# Altium PCB L50T-TEST.PcbDoc (part 2 of 3)
Units mil, origin at the board's own origin, x right, y up, seen from the top; angles counter-clockwise.
Board outline 6860.42 x 9197.04 mil, 2 copper layers (Top Layer, Bottom Layer); 174 components, 146 nets, 565 pads, 293 vias.
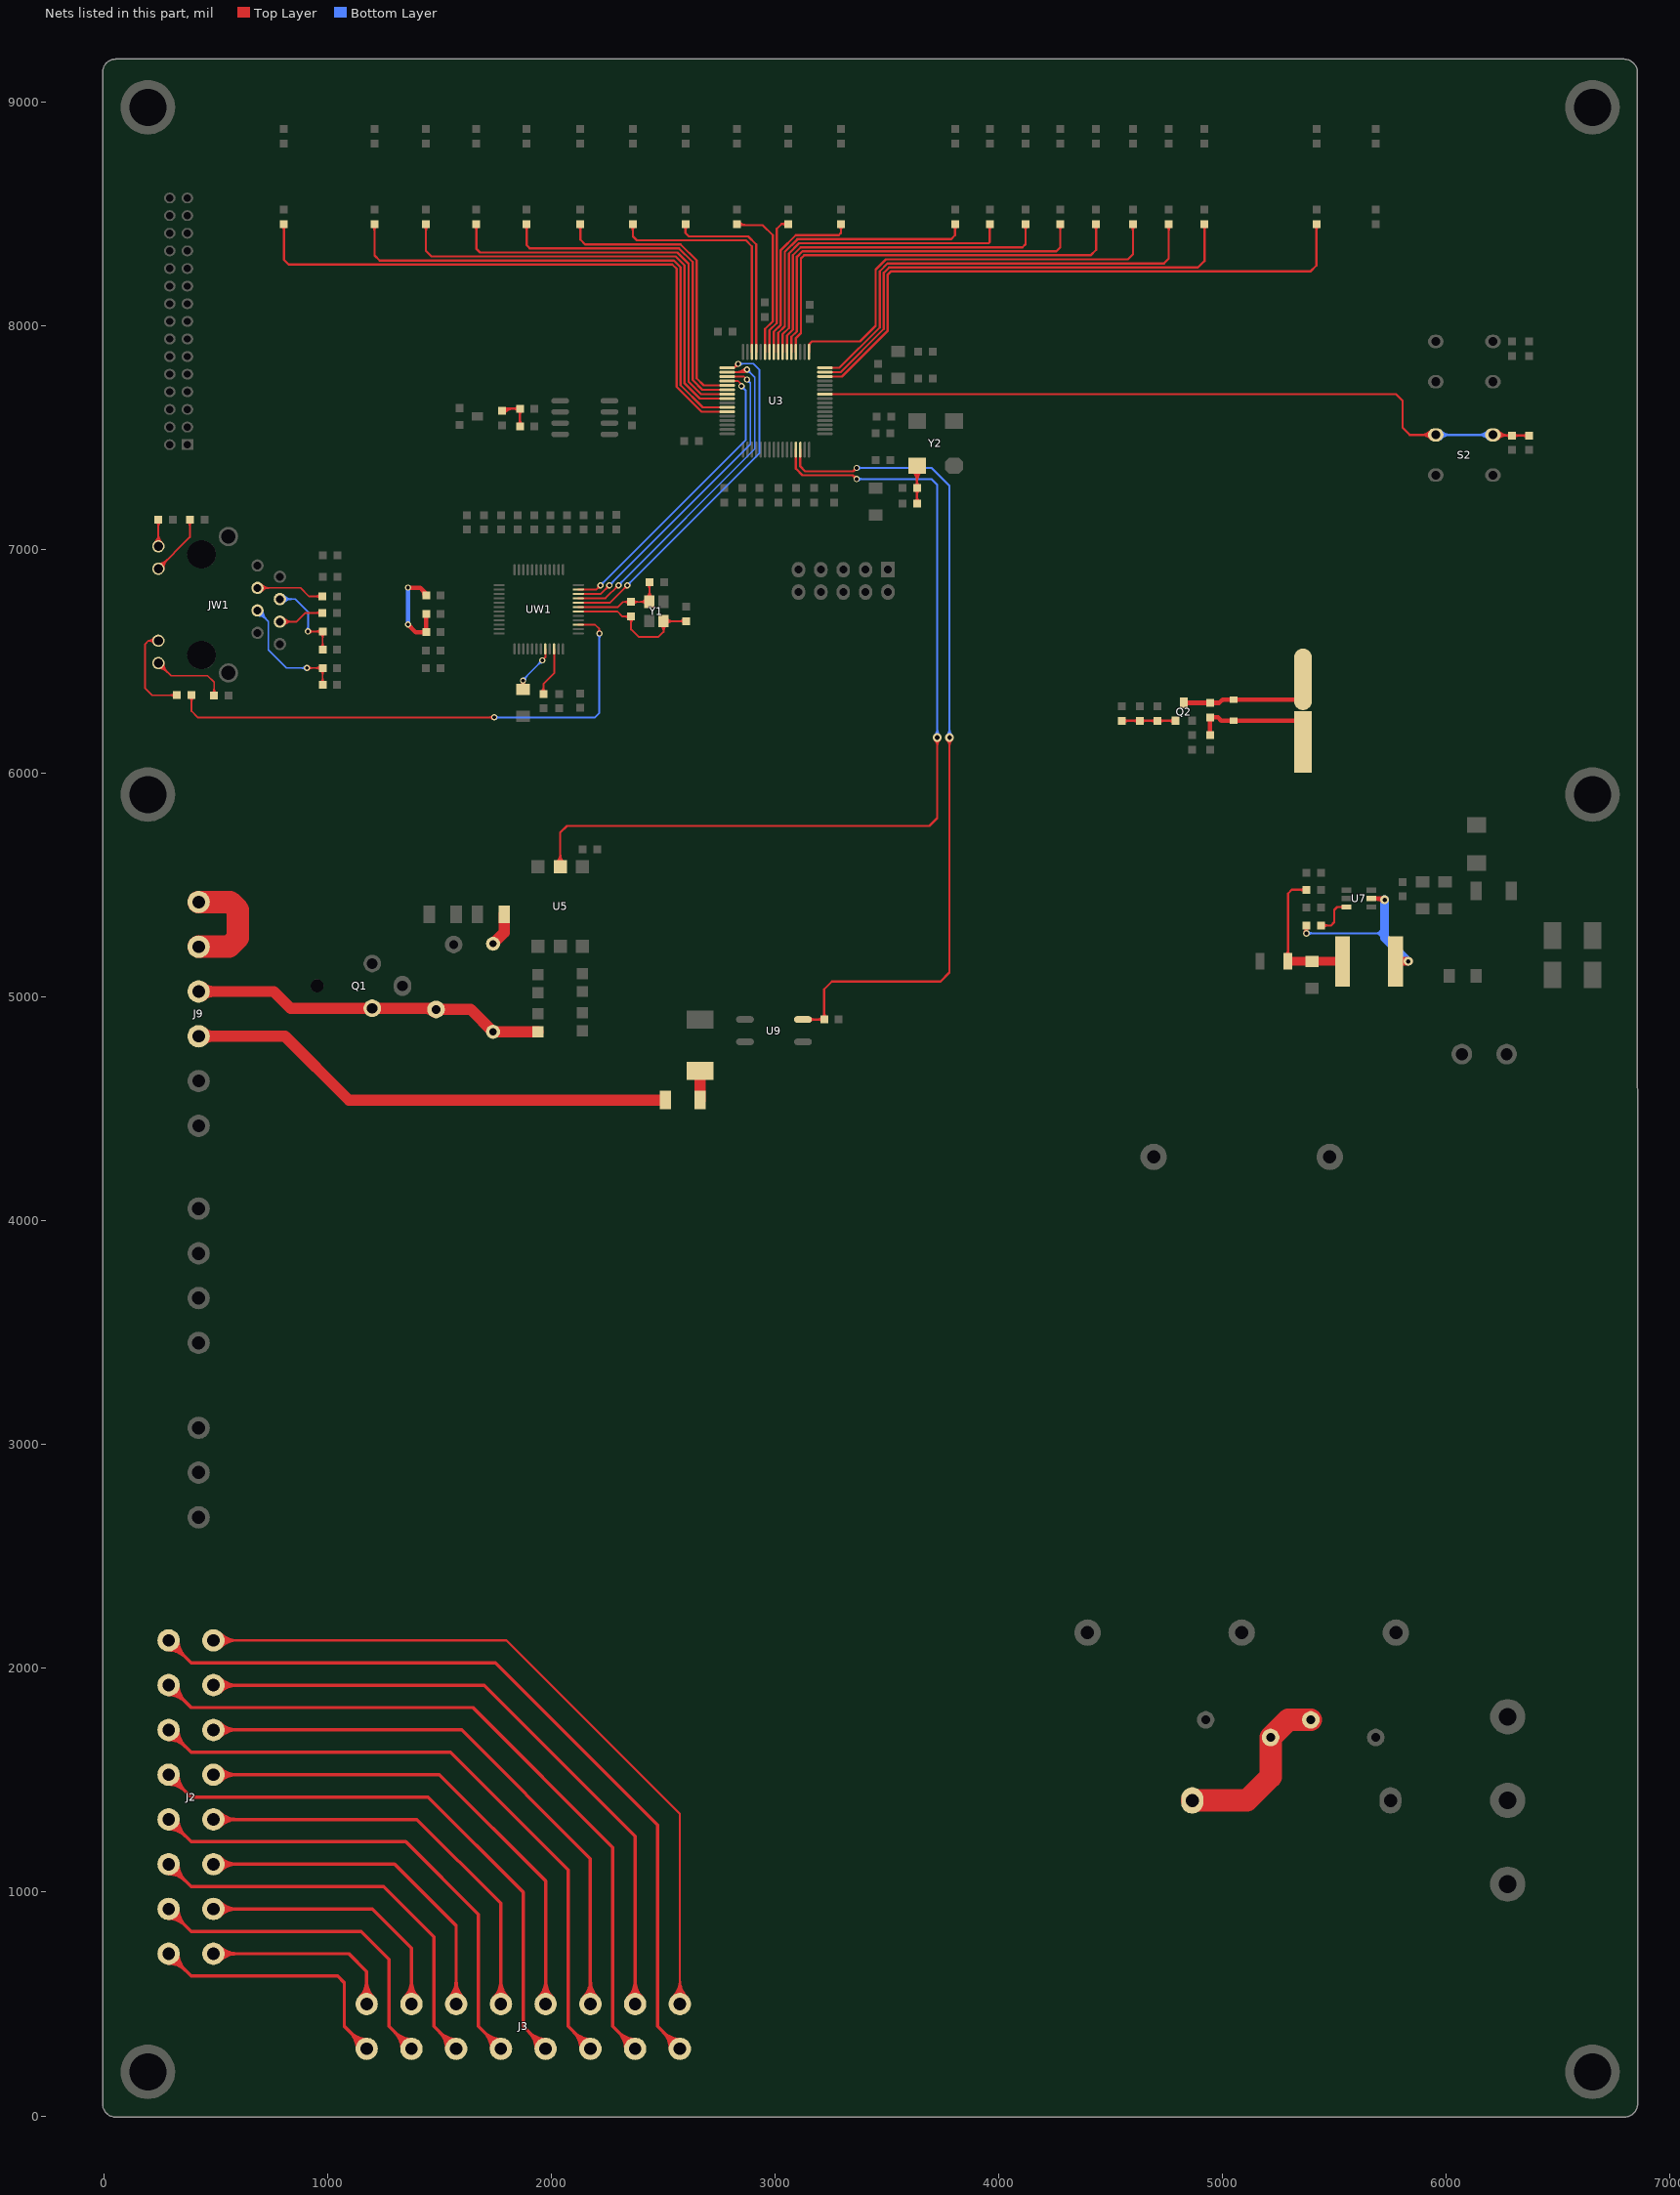
[diagram p2: the nets of this part, all layers, seen from the top]

## Via types
v1: diameter 30, hole 18, Top Layer to Bottom Layer, tented both sides, 242 vias
v2: diameter 28, hole 16, Top Layer to Bottom Layer, tented both sides, 44 vias
v3: diameter 40, hole 20, Top Layer to Bottom Layer, tented both sides, 5 vias
v4: diameter 60, hole 30, Top Layer to Bottom Layer, tented both sides, 2 vias

## Nets (pads, with @x,y where several pads share a name; then routed paths per layer and width w, separated by ;. In a path a pad name is that pad's centre, name@x,y a point inside that pad or via, vN(x,y) a via of type N, cw(c..) or ccw(c..) an arc to the next point about the centre after c; other vN are vias at no path point) (continued)
KEY2: C24.1 R47.2 S2.2 U3.10 | length 4749.4
  Top Layer w10: U3.10@3223.5,7694.53 5775.47,7694.53 5805,7665 5805,7545 5837.18,7512.82 S2.2@5953.27,7512.82 ; S2.2@6209.17,7512.82 6211.99,7510 C24.1@6295,7510 R47.2@6370,7510 ; 5887.91,7512.82 ccw(c5887.91,7573.18) 5930.59,7530.5 cw(c5887.91,7573.18) 5887.91,7512.82 ; 5887.91,7512.82 cw(c5887.91,7452.46) 5930.59,7495.14 ccw(c5887.91,7452.46) 5887.91,7512.82 ; 5912.05,7512.82 ccw(c5912.05,7549.03) 5937.66,7523.43 cw(c5912.05,7549.03) 5912.05,7512.82 ; 5912.05,7512.82 cw(c5912.05,7476.61) 5937.66,7502.21 ccw(c5912.05,7476.61) 5912.05,7512.82 ; 6264.82,7510 ccw(c6264.82,7540.18) 6286.16,7518.84 cw(c6264.82,7540.18) 6264.82,7510 ; 6264.82,7510 cw(c6264.82,7479.82) 6286.16,7501.16 ccw(c6264.82,7479.82) 6264.82,7510 ; 6325.18,7510 ccw(c6325.18,7479.82) 6303.84,7501.16 cw(c6325.18,7479.82) 6325.18,7510 ; 6325.18,7510 cw(c6325.18,7540.18) 6303.84,7518.84 ccw(c6325.18,7540.18) 6325.18,7510 ; 6339.82,7510 ccw(c6339.82,7540.18) 6361.16,7518.84 cw(c6339.82,7540.18) 6339.82,7510 ; 6339.82,7510 cw(c6339.82,7479.82) 6361.16,7501.16 ccw(c6339.82,7479.82) 6339.82,7510 ; S2.2@6224.78,7523.43 ccw(c6257.19,7555.84) 6257.19,7510 cw(c6257.19,7555.84) S2.2@6224.78,7523.43 ; S2.2@6231.85,7495.14 cw(c6267.72,7459.27) 6267.72,7510 ccw(c6267.72,7459.27) S2.2@6231.85,7495.14 ; S2.2@6231.85,7530.5 ccw(c6281.34,7579.98) 6281.34,7510 cw(c6281.34,7579.98) S2.2@6231.85,7530.5
  Bottom Layer w10: S2.2@5953.27,7512.82 S2.2@6209.17,7512.82 ; 5994.48,7512.82 ccw(c5994.48,7476.61) 5968.87,7502.21 cw(c5994.48,7476.61) 5994.48,7512.82 ; 5994.48,7512.82 cw(c5994.48,7549.03) 5968.87,7523.43 ccw(c5994.48,7549.03) 5994.48,7512.82 ; 6018.62,7512.82 ccw(c6018.62,7452.46) 5975.95,7495.14 cw(c6018.62,7452.46) 6018.62,7512.82 ; 6018.62,7512.82 cw(c6018.62,7573.18) 5975.95,7530.5 ccw(c6018.62,7573.18) 6018.62,7512.82 ; 6143.82,7512.82 ccw(c6143.82,7573.18) 6186.5,7530.5 cw(c6143.82,7573.18) 6143.82,7512.82 ; 6143.82,7512.82 cw(c6143.82,7452.46) 6186.5,7495.14 ccw(c6143.82,7452.46) 6143.82,7512.82 ; 6167.96,7512.82 ccw(c6167.96,7549.03) 6193.57,7523.43 cw(c6167.96,7549.03) 6167.96,7512.82 ; 6167.96,7512.82 cw(c6167.96,7476.61) 6193.57,7502.21 ccw(c6167.96,7476.61) 6167.96,7512.82
L1A: J2.2 J3.16 | length 2237.1
  Top Layer w15: J2.2@290,725 390,625 1045,625 1075,595 1075,400 J3.16@1175,300 ; 336.95,678.05 ccw(c290,631.11) 290,697.5 cw(c290,631.11) 336.95,678.05 ; 336.95,678.05 cw(c383.89,725) 317.5,725 ccw(c383.89,725) 336.95,678.05 ; 362.55,652.45 ccw(c290,579.9) 290,682.5 cw(c290,579.9) 362.55,652.45 ; 362.55,652.45 cw(c435.1,725) 332.5,725 ccw(c435.1,725) 362.55,652.45 ; 1102.45,372.55 ccw(c1175,445.1) 1175,342.5 cw(c1175,445.1) 1102.45,372.55 ; 1102.45,372.55 cw(c1029.9,300) 1132.5,300 ccw(c1029.9,300) 1102.45,372.55 ; 1128.05,346.95 ccw(c1175,393.89) 1175,327.5 cw(c1175,393.89) 1128.05,346.95 ; 1128.05,346.95 cw(c1081.11,300) 1147.5,300 ccw(c1081.11,300) 1128.05,346.95
L1B: J2.1 J3.15 | length 1925
  Top Layer w15: J2.1@490,725 1095,725 1175,645 J3.15@1175,500 ; 556.39,725 ccw(c556.39,658.61) 509.45,705.55 cw(c556.39,658.61) 556.39,725 ; 556.39,725 cw(c556.39,791.39) 509.45,744.45 ccw(c556.39,791.39) 556.39,725 ; 592.6,725 ccw(c592.6,622.4) 520.05,694.95 cw(c592.6,622.4) 592.6,725 ; 592.6,725 cw(c592.6,827.6) 520.05,755.05 ccw(c592.6,827.6) 592.6,725 ; 1175,566.39 ccw(c1241.39,566.39) 1194.45,519.45 cw(c1241.39,566.39) 1175,566.39 ; 1175,566.39 cw(c1108.61,566.39) 1155.55,519.45 ccw(c1108.61,566.39) 1175,566.39 ; 1175,602.6 ccw(c1277.6,602.6) 1205.05,530.05 cw(c1277.6,602.6) 1175,602.6 ; 1175,602.6 cw(c1072.4,602.6) 1144.95,530.05 ccw(c1072.4,602.6) 1175,602.6
L2A: J2.4 J3.14 | length 2581.4
  Top Layer w15: J2.4@290,925 390,825 1150,825 1275,700 1275,400 J3.14@1375,300 ; 336.95,878.05 ccw(c290,831.11) 290,897.5 cw(c290,831.11) 336.95,878.05 ; 336.95,878.05 cw(c383.89,925) 317.5,925 ccw(c383.89,925) 336.95,878.05 ; 362.55,852.45 ccw(c290,779.9) 290,882.5 cw(c290,779.9) 362.55,852.45 ; 362.55,852.45 cw(c435.1,925) 332.5,925 ccw(c435.1,925) 362.55,852.45 ; 1302.45,372.55 ccw(c1375,445.1) 1375,342.5 cw(c1375,445.1) 1302.45,372.55 ; 1302.45,372.55 cw(c1229.9,300) 1332.5,300 ccw(c1229.9,300) 1302.45,372.55 ; 1328.05,346.95 ccw(c1375,393.89) 1375,327.5 cw(c1375,393.89) 1328.05,346.95 ; 1328.05,346.95 cw(c1281.11,300) 1347.5,300 ccw(c1281.11,300) 1328.05,346.95
L2B: J2.3 J3.13 | length 2269.3
  Top Layer w15: J2.3@490,925 1200,925 1375,750 J3.13@1375,500 ; 556.39,925 ccw(c556.39,858.61) 509.45,905.55 cw(c556.39,858.61) 556.39,925 ; 556.39,925 cw(c556.39,991.39) 509.45,944.45 ccw(c556.39,991.39) 556.39,925 ; 592.6,925 ccw(c592.6,822.4) 520.05,894.95 cw(c592.6,822.4) 592.6,925 ; 592.6,925 cw(c592.6,1027.6) 520.05,955.05 ccw(c592.6,1027.6) 592.6,925 ; 1375,566.39 ccw(c1441.39,566.39) 1394.45,519.45 cw(c1441.39,566.39) 1375,566.39 ; 1375,566.39 cw(c1308.61,566.39) 1355.55,519.45 ccw(c1308.61,566.39) 1375,566.39 ; 1375,602.6 ccw(c1477.6,602.6) 1405.05,530.05 cw(c1477.6,602.6) 1375,602.6 ; 1375,602.6 cw(c1272.4,602.6) 1344.95,530.05 ccw(c1272.4,602.6) 1375,602.6
L3A: J2.6 J3.12 | length 2922.9
  Top Layer w15: J2.6@290,1125 390,1025 1250,1025 1475,800 1475,400 J3.12@1575,300 ; 336.95,1078.05 ccw(c290,1031.11) 290,1097.5 cw(c290,1031.11) 336.95,1078.05 ; 336.95,1078.05 cw(c383.89,1125) 317.5,1125 ccw(c383.89,1125) 336.95,1078.05 ; 362.55,1052.45 ccw(c290,979.9) 290,1082.5 cw(c290,979.9) 362.55,1052.45 ; 362.55,1052.45 cw(c435.1,1125) 332.5,1125 ccw(c435.1,1125) 362.55,1052.45 ; 1502.45,372.55 ccw(c1575,445.1) 1575,342.5 cw(c1575,445.1) 1502.45,372.55 ; 1502.45,372.55 cw(c1429.9,300) 1532.5,300 ccw(c1429.9,300) 1502.45,372.55 ; 1528.05,346.95 ccw(c1575,393.89) 1575,327.5 cw(c1575,393.89) 1528.05,346.95 ; 1528.05,346.95 cw(c1481.11,300) 1547.5,300 ccw(c1481.11,300) 1528.05,346.95
L3B: J2.5 J3.11 | length 2610.7
  Top Layer w15: J2.5@490,1125 1300,1125 1575,850 J3.11@1575,500 ; 556.39,1125 ccw(c556.39,1058.61) 509.45,1105.55 cw(c556.39,1058.61) 556.39,1125 ; 556.39,1125 cw(c556.39,1191.39) 509.45,1144.45 ccw(c556.39,1191.39) 556.39,1125 ; 592.6,1125 ccw(c592.6,1022.4) 520.05,1094.95 cw(c592.6,1022.4) 592.6,1125 ; 592.6,1125 cw(c592.6,1227.6) 520.05,1155.05 ccw(c592.6,1227.6) 592.6,1125 ; 1575,566.39 ccw(c1641.39,566.39) 1594.45,519.45 cw(c1641.39,566.39) 1575,566.39 ; 1575,566.39 cw(c1508.61,566.39) 1555.55,519.45 ccw(c1508.61,566.39) 1575,566.39 ; 1575,602.6 ccw(c1677.6,602.6) 1605.05,530.05 cw(c1677.6,602.6) 1575,602.6 ; 1575,602.6 cw(c1472.4,602.6) 1544.95,530.05 ccw(c1472.4,602.6) 1575,602.6
L4A: J2.8 J3.10 | length 3264.3
  Top Layer w15: J2.8@290,1325 390,1225 1350,1225 1675,900 1675,400 J3.10@1775,300 ; 336.95,1278.05 ccw(c290,1231.11) 290,1297.5 cw(c290,1231.11) 336.95,1278.05 ; 336.95,1278.05 cw(c383.89,1325) 317.5,1325 ccw(c383.89,1325) 336.95,1278.05 ; 362.55,1252.45 ccw(c290,1179.9) 290,1282.5 cw(c290,1179.9) 362.55,1252.45 ; 362.55,1252.45 cw(c435.1,1325) 332.5,1325 ccw(c435.1,1325) 362.55,1252.45 ; 1702.45,372.55 ccw(c1775,445.1) 1775,342.5 cw(c1775,445.1) 1702.45,372.55 ; 1702.45,372.55 cw(c1629.9,300) 1732.5,300 ccw(c1629.9,300) 1702.45,372.55 ; 1728.05,346.95 ccw(c1775,393.89) 1775,327.5 cw(c1775,393.89) 1728.05,346.95 ; 1728.05,346.95 cw(c1681.11,300) 1747.5,300 ccw(c1681.11,300) 1728.05,346.95
L4B: J2.7 J3.9 | length 2952.2
  Top Layer w15: J2.7@490,1325 1400,1325 1775,950 J3.9@1775,500 ; 556.39,1325 ccw(c556.39,1258.61) 509.45,1305.55 cw(c556.39,1258.61) 556.39,1325 ; 556.39,1325 cw(c556.39,1391.39) 509.45,1344.45 ccw(c556.39,1391.39) 556.39,1325 ; 592.6,1325 ccw(c592.6,1222.4) 520.05,1294.95 cw(c592.6,1222.4) 592.6,1325 ; 592.6,1325 cw(c592.6,1427.6) 520.05,1355.05 ccw(c592.6,1427.6) 592.6,1325 ; 1775,566.39 ccw(c1841.39,566.39) 1794.45,519.45 cw(c1841.39,566.39) 1775,566.39 ; 1775,566.39 cw(c1708.61,566.39) 1755.55,519.45 ccw(c1708.61,566.39) 1775,566.39 ; 1775,602.6 ccw(c1877.6,602.6) 1805.05,530.05 cw(c1877.6,602.6) 1775,602.6 ; 1775,602.6 cw(c1672.4,602.6) 1744.95,530.05 ccw(c1672.4,602.6) 1775,602.6
L5A: J2.10 J3.8 | length 3605.7
  Top Layer w15: J2.10@290,1525 390,1425 1450,1425 1875,1000 1875,400 J3.8@1975,300 ; 336.95,1478.05 ccw(c290,1431.11) 290,1497.5 cw(c290,1431.11) 336.95,1478.05 ; 336.95,1478.05 cw(c383.89,1525) 317.5,1525 ccw(c383.89,1525) 336.95,1478.05 ; 362.55,1452.45 ccw(c290,1379.9) 290,1482.5 cw(c290,1379.9) 362.55,1452.45 ; 362.55,1452.45 cw(c435.1,1525) 332.5,1525 ccw(c435.1,1525) 362.55,1452.45 ; 1902.45,372.55 ccw(c1975,445.1) 1975,342.5 cw(c1975,445.1) 1902.45,372.55 ; 1902.45,372.55 cw(c1829.9,300) 1932.5,300 ccw(c1829.9,300) 1902.45,372.55 ; 1928.05,346.95 ccw(c1975,393.89) 1975,327.5 cw(c1975,393.89) 1928.05,346.95 ; 1928.05,346.95 cw(c1881.11,300) 1947.5,300 ccw(c1881.11,300) 1928.05,346.95
L5B: J2.9 J3.7 | length 3293.6
  Top Layer w15: J2.9@490,1525 1500,1525 1975,1050 J3.7@1975,500 ; 556.39,1525 ccw(c556.39,1458.61) 509.45,1505.55 cw(c556.39,1458.61) 556.39,1525 ; 556.39,1525 cw(c556.39,1591.39) 509.45,1544.45 ccw(c556.39,1591.39) 556.39,1525 ; 592.6,1525 ccw(c592.6,1422.4) 520.05,1494.95 cw(c592.6,1422.4) 592.6,1525 ; 592.6,1525 cw(c592.6,1627.6) 520.05,1555.05 ccw(c592.6,1627.6) 592.6,1525 ; 1975,566.39 ccw(c2041.39,566.39) 1994.45,519.45 cw(c2041.39,566.39) 1975,566.39 ; 1975,566.39 cw(c1908.61,566.39) 1955.55,519.45 ccw(c1908.61,566.39) 1975,566.39 ; 1975,602.6 ccw(c2077.6,602.6) 2005.05,530.05 cw(c2077.6,602.6) 1975,602.6 ; 1975,602.6 cw(c1872.4,602.6) 1944.95,530.05 ccw(c1872.4,602.6) 1975,602.6
L6A: J2.12 J3.6 | length 3947.1
  Top Layer w15: J2.12@290,1725 390,1625 1550,1625 2075,1100 2075,400 J3.6@2175,300 ; 336.95,1678.05 ccw(c290,1631.11) 290,1697.5 cw(c290,1631.11) 336.95,1678.05 ; 336.95,1678.05 cw(c383.89,1725) 317.5,1725 ccw(c383.89,1725) 336.95,1678.05 ; 362.55,1652.45 ccw(c290,1579.9) 290,1682.5 cw(c290,1579.9) 362.55,1652.45 ; 362.55,1652.45 cw(c435.1,1725) 332.5,1725 ccw(c435.1,1725) 362.55,1652.45 ; 2102.45,372.55 ccw(c2175,445.1) 2175,342.5 cw(c2175,445.1) 2102.45,372.55 ; 2102.45,372.55 cw(c2029.9,300) 2132.5,300 ccw(c2029.9,300) 2102.45,372.55 ; 2128.05,346.95 ccw(c2175,393.89) 2175,327.5 cw(c2175,393.89) 2128.05,346.95 ; 2128.05,346.95 cw(c2081.11,300) 2147.5,300 ccw(c2081.11,300) 2128.05,346.95
L6B: J2.11 J3.5 | length 3635
  Top Layer w15: J2.11@490,1725 1600,1725 2175,1150 J3.5@2175,500 ; 556.39,1725 ccw(c556.39,1658.61) 509.45,1705.55 cw(c556.39,1658.61) 556.39,1725 ; 556.39,1725 cw(c556.39,1791.39) 509.45,1744.45 ccw(c556.39,1791.39) 556.39,1725 ; 592.6,1725 ccw(c592.6,1622.4) 520.05,1694.95 cw(c592.6,1622.4) 592.6,1725 ; 592.6,1725 cw(c592.6,1827.6) 520.05,1755.05 ccw(c592.6,1827.6) 592.6,1725 ; 2175,566.39 ccw(c2241.39,566.39) 2194.45,519.45 cw(c2241.39,566.39) 2175,566.39 ; 2175,566.39 cw(c2108.61,566.39) 2155.55,519.45 ccw(c2108.61,566.39) 2175,566.39 ; 2175,602.6 ccw(c2277.6,602.6) 2205.05,530.05 cw(c2277.6,602.6) 2175,602.6 ; 2175,602.6 cw(c2072.4,602.6) 2144.95,530.05 ccw(c2072.4,602.6) 2175,602.6
L7A: J2.14 J3.4 | length 4288.6
  Top Layer w15: J2.14@290,1925 390,1825 1650,1825 2275,1200 2275,400 J3.4@2375,300 ; 336.95,1878.05 ccw(c290,1831.11) 290,1897.5 cw(c290,1831.11) 336.95,1878.05 ; 336.95,1878.05 cw(c383.89,1925) 317.5,1925 ccw(c383.89,1925) 336.95,1878.05 ; 362.55,1852.45 ccw(c290,1779.9) 290,1882.5 cw(c290,1779.9) 362.55,1852.45 ; 362.55,1852.45 cw(c435.1,1925) 332.5,1925 ccw(c435.1,1925) 362.55,1852.45 ; 2302.45,372.55 ccw(c2375,445.1) 2375,342.5 cw(c2375,445.1) 2302.45,372.55 ; 2302.45,372.55 cw(c2229.9,300) 2332.5,300 ccw(c2229.9,300) 2302.45,372.55 ; 2328.05,346.95 ccw(c2375,393.89) 2375,327.5 cw(c2375,393.89) 2328.05,346.95 ; 2328.05,346.95 cw(c2281.11,300) 2347.5,300 ccw(c2281.11,300) 2328.05,346.95
L7B: J2.13 J3.3 | length 3976.4
  Top Layer w15: J2.13@490,1925 1700,1925 2375,1250 J3.3@2375,500 ; 556.39,1925 ccw(c556.39,1858.61) 509.45,1905.55 cw(c556.39,1858.61) 556.39,1925 ; 556.39,1925 cw(c556.39,1991.39) 509.45,1944.45 ccw(c556.39,1991.39) 556.39,1925 ; 592.6,1925 ccw(c592.6,1822.4) 520.05,1894.95 cw(c592.6,1822.4) 592.6,1925 ; 592.6,1925 cw(c592.6,2027.6) 520.05,1955.05 ccw(c592.6,2027.6) 592.6,1925 ; 2375,566.39 ccw(c2441.39,566.39) 2394.45,519.45 cw(c2441.39,566.39) 2375,566.39 ; 2375,566.39 cw(c2308.61,566.39) 2355.55,519.45 ccw(c2308.61,566.39) 2375,566.39 ; 2375,602.6 ccw(c2477.6,602.6) 2405.05,530.05 cw(c2477.6,602.6) 2375,602.6 ; 2375,602.6 cw(c2272.4,602.6) 2344.95,530.05 ccw(c2272.4,602.6) 2375,602.6
L8A: J2.16 J3.2 | length 4630
  Top Layer w15: J2.16@290,2125 390,2025 1750,2025 2475,1300 2475,400 J3.2@2575,300 ; 336.95,2078.05 ccw(c290,2031.11) 290,2097.5 cw(c290,2031.11) 336.95,2078.05 ; 336.95,2078.05 cw(c383.89,2125) 317.5,2125 ccw(c383.89,2125) 336.95,2078.05 ; 362.55,2052.45 ccw(c290,1979.9) 290,2082.5 cw(c290,1979.9) 362.55,2052.45 ; 362.55,2052.45 cw(c435.1,2125) 332.5,2125 ccw(c435.1,2125) 362.55,2052.45 ; 2502.45,372.55 ccw(c2575,445.1) 2575,342.5 cw(c2575,445.1) 2502.45,372.55 ; 2502.45,372.55 cw(c2429.9,300) 2532.5,300 ccw(c2429.9,300) 2502.45,372.55 ; 2528.05,346.95 ccw(c2575,393.89) 2575,327.5 cw(c2575,393.89) 2528.05,346.95 ; 2528.05,346.95 cw(c2481.11,300) 2547.5,300 ccw(c2481.11,300) 2528.05,346.95
L8B: J2.15 J3.1 | length 4848.8
  Top Layer w10: J2.15@490,2125 1800,2125 2575,1350 J3.1@2575,500 ; 550.36,2125 ccw(c550.36,2064.64) 507.68,2107.32 cw(c550.36,2064.64) 550.36,2125 ; 550.36,2125 cw(c550.36,2185.36) 507.68,2142.68 ccw(c550.36,2185.36) 550.36,2125 ; 574.5,2125 ccw(c574.5,2040.5) 514.75,2100.25 cw(c574.5,2040.5) 574.5,2125 ; 574.5,2125 cw(c574.5,2209.5) 514.75,2149.75 ccw(c574.5,2209.5) 574.5,2125 ; 598.64,2125 ccw(c598.64,2016.36) 521.82,2093.18 cw(c598.64,2016.36) 598.64,2125 ; 598.64,2125 cw(c598.64,2233.64) 521.82,2156.82 ccw(c598.64,2233.64) 598.64,2125 ; 2575,560.36 ccw(c2635.36,560.36) 2592.68,517.68 cw(c2635.36,560.36) 2575,560.36 ; 2575,560.36 cw(c2514.64,560.36) 2557.32,517.68 ccw(c2514.64,560.36) 2575,560.36 ; 2575,584.5 ccw(c2659.5,584.5) 2599.75,524.75 cw(c2659.5,584.5) 2575,584.5 ; 2575,584.5 cw(c2490.5,584.5) 2550.25,524.75 ccw(c2490.5,584.5) 2575,584.5 ; 2575,608.64 ccw(c2683.64,608.64) 2606.82,531.82 cw(c2683.64,608.64) 2575,608.64 ; 2575,608.64 cw(c2466.36,608.64) 2543.18,531.82 ccw(c2466.36,608.64) 2575,608.64
LED1: R11.1 U3.42 | length 2401.6
  Top Layer w10: R11.1@1210,8455 1210,8315 1233,8292 2548.46,8292 2578,8262.46 2578,7735.18 2677.7,7635.47 U3.42@2786.5,7635.47 ; 1210,8424.82 ccw(c1179.82,8424.82) 1201.16,8446.16 cw(c1179.82,8424.82) 1210,8424.82 ; 1210,8424.82 cw(c1240.18,8424.82) 1218.84,8446.16 ccw(c1240.18,8424.82) 1210,8424.82
LED2: R12.1 U3.40 | length 2143.6
  Top Layer w10: R12.1@1440,8455 1440,8335 1465,8310 2555.91,8310 2596,8269.91 2596,7742.63 2663.79,7674.84 U3.40@2786.5,7674.84 ; 1440,8424.82 ccw(c1409.82,8424.82) 1431.16,8446.16 cw(c1409.82,8424.82) 1440,8424.82 ; 1440,8424.82 cw(c1470.18,8424.82) 1448.84,8446.16 ccw(c1470.18,8424.82) 1440,8424.82
LED3: R13.1 U3.39 | length 1904.6
  Top Layer w10: R13.1@1665,8455 1665,8345 1682,8328 2563.37,8328 2614,8277.37 2614,7750.09 2669.56,7694.53 U3.39@2786.5,7694.53 ; 1665,8424.82 ccw(c1634.82,8424.82) 1656.16,8446.16 cw(c1634.82,8424.82) 1665,8424.82 ; 1665,8424.82 cw(c1695.18,8424.82) 1673.84,8446.16 ccw(c1695.18,8424.82) 1665,8424.82
LED4: R14.1 U3.38 | length 1662.7
  Top Layer w10: R14.1@1890,8455 1890,8360 1904,8346 2570.82,8346 2632,8284.82 2632,7757.54 2675.33,7714.21 U3.38@2786.5,7714.21 ; 1890,8424.82 ccw(c1859.82,8424.82) 1881.16,8446.16 cw(c1859.82,8424.82) 1890,8424.82 ; 1890,8424.82 cw(c1920.18,8424.82) 1898.84,8446.16 ccw(c1920.18,8424.82) 1890,8424.82
LED5: R15.1 U3.37 | length 1399.9
  Top Layer w10: R15.1@2130,8455 2130,8385 2151,8364 2578.28,8364 2650,8292.28 2650,7765 2681.1,7733.9 U3.37@2786.5,7733.9 ; 2130,8424.82 ccw(c2099.82,8424.82) 2121.16,8446.16 cw(c2099.82,8424.82) 2130,8424.82 ; 2130,8424.82 cw(c2160.18,8424.82) 2138.84,8446.16 ccw(c2160.18,8424.82) 2130,8424.82
LED6: R16.1 U3.30 | length 1171.8
  Top Layer w10: R16.1@2365,8455 2365,8400 2383,8382 2870,8382 2896.73,8355.27 U3.30@2896.73,7883.5 ; 2365,8424.82 ccw(c2334.82,8424.82) 2356.16,8446.16 cw(c2334.82,8424.82) 2365,8424.82 ; 2365,8424.82 cw(c2395.18,8424.82) 2373.84,8446.16 ccw(c2395.18,8424.82) 2365,8424.82
LED7: R17.1 U3.29 | length 952.6
  Top Layer w10: R17.1@2600,8455 2600,8415 2615,8400 2880,8400 2916.42,8363.58 U3.29@2916.42,7883.5 ; 2600,8424.82 ccw(c2569.82,8424.82) 2591.16,8446.16 cw(c2569.82,8424.82) 2600,8424.82 ; 2600,8424.82 cw(c2630.18,8424.82) 2608.84,8446.16 ccw(c2630.18,8424.82) 2600,8424.82
LED8: R18.1 U3.27 | length 847.5
  Top Layer w10: R18.1@2830,8455 2835,8450 2945,8450 2990,8405 2990,8020 2955.79,7985.79 U3.27@2955.79,7883.5 ; 2848.11,8450 ccw(c2848.11,8436.89) 2838.84,8446.16 cw(c2848.11,8436.89) 2848.11,8450 ; 2848.11,8450 cw(c2848.11,8473.11) 2831.77,8456.77 ccw(c2848.11,8473.11) 2848.11,8450 ; R18.1@2838.84,8463.84 ccw(c2872.25,8497.25) 2872.25,8450 cw(c2872.25,8497.25) R18.1@2838.84,8463.84
LED9: R19.1 U3.26 | length 718
  Top Layer w10: U3.26@2975.47,7883.5 2975.47,7980.02 3008,8012.54 3008,8433 3030,8455 ; R19.1@3060,8455 3030,8455 ; 3030,8455 ccw(c3030,8484.75) 3051.12,8463.8 cw(c3030,8484.75) 3030,8455 ; 3030,8455 cw(c3030,8425.25) 3051.12,8446.2 ccw(c3030,8425.25) 3030,8455
LED10: R20.1 U3.25 | length 903.1
  Top Layer w10: U3.25@2995.16,7883.5 2995.16,7974.25 3026,8005.09 3026,8338.28 3092.72,8405 3285,8405 3295,8415 R20.1@3295,8455 ; 3295,8424.82 ccw(c3264.82,8424.82) 3286.16,8446.16 cw(c3264.82,8424.82) 3295,8424.82 ; 3295,8424.82 cw(c3325.18,8424.82) 3303.84,8446.16 ccw(c3325.18,8424.82) 3295,8424.82
LED_COU: R24.1 U3.23 | length 1545.4
  Top Layer w10: U3.23@3034.53,7883.5 3034.53,7962.7 3062,7990.18 3062,8323.37 3107.63,8369 3954,8369 3960,8375 R24.1@3960,8455 ; 3960,8424.82 ccw(c3929.82,8424.82) 3951.16,8446.16 cw(c3929.82,8424.82) 3960,8424.82 ; 3960,8424.82 cw(c3990.18,8424.82) 3968.84,8446.16 ccw(c3990.18,8424.82) 3960,8424.82
LED_CPU: R23.1 U3.24 | length 1395.9
  Top Layer w10: U3.24@3014.84,7883.5 3014.84,7968.48 3044,7997.63 3044,8330.82 3100.18,8387 3787,8387 3805,8405 R23.1@3805,8455 ; 3805,8424.82 ccw(c3774.82,8424.82) 3796.16,8446.16 cw(c3774.82,8424.82) 3805,8424.82 ; 3805,8424.82 cw(c3835.18,8424.82) 3813.84,8446.16 ccw(c3835.18,8424.82) 3805,8424.82
LED_DET: R27.1 U3.20 | length 1971.7
  Top Layer w10: U3.20@3093.58,7883.5 3093.58,7945.39 3116,7967.81 3116,8301 3130,8315 4410,8315 4435,8340 R27.1@4435,8455 ; 4435,8424.82 ccw(c4404.82,8424.82) 4426.16,8446.16 cw(c4404.82,8424.82) 4435,8424.82 ; 4435,8424.82 cw(c4465.18,8424.82) 4443.84,8446.16 ccw(c4465.18,8424.82) 4435,8424.82
LED_IOU: R28.1 U3.17 | length 2052.9
  Top Layer w10: U3.17@3152.64,7883.5 3152.64,7917.64 3165,7930 3379.54,7930 3450,8000.46 3450,8251.37 3495.63,8297 4577,8297 4600,8320 R28.1@4600,8455 R28.1@4595,8450 ; 4600,8424.82 ccw(c4569.82,8424.82) 4591.16,8446.16 cw(c4569.82,8424.82) 4600,8424.82 ; 4600,8424.82 cw(c4630.18,8424.82) 4608.84,8446.16 ccw(c4630.18,8424.82) 4600,8424.82 ; U3.17@3153.54,7913.03 cw(c3166.85,7913.03) 3157.44,7922.44 ccw(c3166.85,7913.03) U3.17@3153.54,7913.03
LED_MAU: R29.1 U3.16 | length 2135.2
  Top Layer w10: U3.16@3223.5,7812.64 3287.64,7812.64 3468,7993 3468,8243.91 3503.09,8279 4739,8279 4760,8300 R29.1@4760,8455 ; 4760,8424.82 ccw(c4729.82,8424.82) 4751.16,8446.16 cw(c4729.82,8424.82) 4760,8424.82 ; 4760,8424.82 cw(c4790.18,8424.82) 4768.84,8446.16 ccw(c4790.18,8424.82) 4760,8424.82
LED_MFU: R30.1 U3.15 | length 2309.2
  Top Layer w10: U3.15@3223.5,7792.95 3293.41,7792.95 3486,7985.54 3486,8236.46 3510.54,8261 4891,8261 4920,8290 R30.1@4920,8455 ; 4920,8424.82 ccw(c4889.82,8424.82) 4911.16,8446.16 cw(c4889.82,8424.82) 4920,8424.82 ; 4920,8424.82 cw(c4950.18,8424.82) 4928.84,8446.16 ccw(c4950.18,8424.82) 4920,8424.82
LED_OK: R38.1 U3.43 | length 2833.6
  Top Layer w10: R38.1@800,8450 R38.1@805,8455 805,8295 826,8274 2541,8274 2560,8255 2560,7727.72 2671.93,7615.79 U3.43@2786.5,7615.79 ; 805,8424.82 ccw(c774.82,8424.82) 796.16,8446.16 cw(c774.82,8424.82) 805,8424.82 ; 805,8424.82 cw(c835.18,8424.82) 813.84,8446.16 ccw(c835.18,8424.82) 805,8424.82
LED_PDU: R26.1 U3.21 | length 1828.9
  Top Layer w10: U3.21@3073.9,7883.5 3073.9,7951.16 3098,7975.27 3098,8308.46 3122.54,8333 4258,8333 4275,8350 R26.1@4275,8455 ; 4275,8424.82 ccw(c4244.82,8424.82) 4266.16,8446.16 cw(c4244.82,8424.82) 4275,8424.82 ; 4275,8424.82 cw(c4305.18,8424.82) 4283.84,8446.16 ccw(c4305.18,8424.82) 4275,8424.82
LED_RUN: R37.1 U3.14 | length 2829
  Top Layer w10: U3.14@3223.5,7773.27 3299.18,7773.27 3504,7978.09 3504,8229 3518,8243 5393,8243 5420,8270 R37.1@5420,8455 ; 5420,8424.82 ccw(c5389.82,8424.82) 5411.16,8446.16 cw(c5389.82,8424.82) 5420,8424.82 ; 5420,8424.82 cw(c5450.18,8424.82) 5428.84,8446.16 ccw(c5450.18,8424.82) 5420,8424.82
LED_SSU: R25.1 U3.22 | length 1688.2
  Top Layer w10: U3.22@3054.21,7883.5 3054.21,7956.93 3080,7982.72 3080,8315.91 3115.09,8351 4106,8351 4120,8365 R25.1@4120,8455 ; 4120,8424.82 ccw(c4089.82,8424.82) 4111.16,8446.16 cw(c4089.82,8424.82) 4120,8424.82 ; 4120,8424.82 cw(c4150.18,8424.82) 4128.84,8446.16 ccw(c4150.18,8424.82) 4120,8424.82
MFU_Control: U3.61 U5.2 | length 4761.1
  Top Layer w10: U5.2@2040,5582.17 2040,5735 2070,5765 3690,5765 3725,5800 v3(3725,6160) ; U3.61@3093.58,7446.5 3093.58,7361.42 3123,7332 3348,7332 v2(3365,7315) ; 2040,5617.24 ccw(c2075.07,5617.24) 2050.27,5592.44 cw(c2075.07,5617.24) 2040,5617.24 ; 2040,5617.24 cw(c2004.93,5617.24) 2029.73,5592.44 ccw(c2004.93,5617.24) 2040,5617.24 ; 2040,5641.38 ccw(c2099.21,5641.38) 2057.34,5599.51 cw(c2099.21,5641.38) 2040,5641.38 ; 2040,5641.38 cw(c1980.79,5641.38) 2022.66,5599.51 ccw(c1980.79,5641.38) 2040,5641.38 ; 3349.64,7330.36 ccw(c3365,7345.73) 3365,7324 cw(c3365,7345.73) 3349.64,7330.36 ; 3349.64,7330.36 cw(c3334.27,7315) 3356,7315 ccw(c3334.27,7315) 3349.64,7330.36 ; 3725,6123.79 ccw(c3688.79,6123.79) 3714.39,6149.39 cw(c3688.79,6123.79) 3725,6123.79 ; 3725,6123.79 cw(c3761.21,6123.79) 3735.61,6149.39 ccw(c3761.21,6123.79) 3725,6123.79
  Bottom Layer w10: v2(3365,7315) 3700,7315 3725,7290 v3(3725,6160) ; 3386.73,7315 ccw(c3386.73,7293.27) 3371.36,7308.64 cw(c3386.73,7293.27) 3386.73,7315 ; 3386.73,7315 cw(c3386.73,7336.73) 3371.36,7321.36 ccw(c3386.73,7336.73) 3386.73,7315 ; 3725,6196.21 ccw(c3761.21,6196.21) 3735.61,6170.61 cw(c3761.21,6196.21) 3725,6196.21 ; 3725,6196.21 cw(c3688.79,6196.21) 3714.39,6170.61 ccw(c3688.79,6196.21) 3725,6196.21
MFU_EN: C12.2 J9.4 Q1.1 R35.2 RV1.2 | length 1861.5
  Top Layer w50: J9.4@424,5025 760,5025 835,4950 Q1.1@1200,4950 1480,4950 RV1.2@1485,4945 1640,4945 C12.2@1740,4845 R35.2@1940,4845 ; 484.36,5025 ccw(c484.36,4964.64) 441.68,5007.32 cw(c484.36,4964.64) 484.36,5025 ; 484.36,5025 cw(c484.36,5085.36) 441.68,5042.68 ccw(c484.36,5085.36) 484.36,5025 ; 1438.24,4950 cw(c1438.24,4898.24) 1474.84,4934.84 ccw(c1438.24,4898.24) 1438.24,4950
MFU_WORK: D6.2 J9.3 | length 2393.7
  Top Layer w50: J9.3@424,4825 810,4825 1095,4540 D6.2@2510,4540 ; 484.36,4825 ccw(c484.36,4764.64) 441.68,4807.32 cw(c484.36,4764.64) 484.36,4825 ; 484.36,4825 cw(c484.36,4885.36) 441.68,4842.68 ccw(c484.36,4885.36) 484.36,4825
MFU_WORK_C: R42.2 U3.62 U9.4 | length 4413
  Top Layer w10: U3.62@3113.27,7446.5 3113.27,7371.73 3135,7350 3350,7350 ; U9.4@3125,4900 R42.2@3220,4900 3220,5035 3255,5070 3740,5070 3780,5110 v3(3780,6160) ; v2(3365,7365) 3350,7350 ; 3174.14,4900 ccw(c3174.14,4875.86) 3157.07,4892.93 cw(c3174.14,4875.86) 3174.14,4900 ; 3174.14,4900 cw(c3174.14,4924.14) 3157.07,4907.07 ccw(c3174.14,4924.14) 3174.14,4900 ; 3189.82,4900 ccw(c3189.82,4930.18) R42.2@3211.16,4908.84 ; 3189.82,4900 cw(c3189.82,4869.82) 3211.16,4891.16 ccw(c3189.82,4869.82) 3189.82,4900 ; 3189.82,4900 ccw(c3189.82,4930.18) R42.2@3211.16,4908.84 ; R42.2@3211.16,4908.84 ccw(c3189.82,4930.18) 3220,4930.18 ; R42.2@3211.16,4908.84 ccw(c3189.82,4930.18) 3220,4930.18 ; 3220,4930.18 ccw(c3250.18,4930.18) 3228.84,4908.84 cw(c3250.18,4930.18) 3220,4930.18 ; 3350,7350 ccw(c3335.51,7364.49) 3356,7364.85 cw(c3335.51,7364.49) 3350,7350 ; 3350,7350 cw(c3364.49,7335.51) 3364.85,7356 ccw(c3364.49,7335.51) 3350,7350 ; 3780,6123.79 ccw(c3743.79,6123.79) 3769.39,6149.39 cw(c3743.79,6123.79) 3780,6123.79 ; 3780,6123.79 cw(c3816.21,6123.79) 3790.61,6149.39 ccw(c3816.21,6123.79) 3780,6123.79
  Bottom Layer w10: v2(3365,7365) 3700,7365 3780,7285 v3(3780,6160) ; 3386.73,7365 ccw(c3386.73,7343.27) 3371.36,7358.64 cw(c3386.73,7343.27) 3386.73,7365 ; 3386.73,7365 cw(c3386.73,7386.73) 3371.36,7371.36 ccw(c3386.73,7386.73) 3386.73,7365 ; 3780,6196.21 ccw(c3816.21,6196.21) 3790.61,6170.61 cw(c3816.21,6196.21) 3780,6196.21 ; 3780,6196.21 cw(c3743.79,6196.21) 3769.39,6170.61 ccw(c3743.79,6196.21) 3780,6196.21
nACTLED: RW16.2 UW1.27 | length 2776.1
  Top Layer w8: RW16.2@392,6349 392,6278 420,6250 v2(1745,6250) ; UW1.27@2121.33,6664.26 2195.74,6664.26 2215,6645 ; v2(2215,6625) 2215,6645 ; 392,6316.41 ccw(c359.41,6316.41) 382.45,6339.45 cw(c359.41,6316.41) 392,6316.41 ; 392,6316.41 cw(c424.59,6316.41) 401.55,6339.45 ccw(c424.59,6316.41) 392,6316.41 ; 1720.86,6250 ccw(c1720.86,6274.14) 1737.93,6257.07 cw(c1720.86,6274.14) 1720.86,6250 ; 1720.86,6250 cw(c1720.86,6225.86) 1737.93,6242.93 ccw(c1720.86,6225.86) 1720.86,6250 ; 2215,6645 ccw(c2230,6645) 2221,6633 cw(c2230,6645) 2215,6645 ; 2215,6645 cw(c2200,6645) 2209,6633 ccw(c2200,6645) 2215,6645
  Bottom Layer w8: v2(1745,6250) 2195,6250 2215,6270 v2(2215,6625) ; 1769.14,6250 ccw(c1769.14,6225.86) 1752.07,6242.93 cw(c1769.14,6225.86) 1769.14,6250 ; 1769.14,6250 cw(c1769.14,6274.14) 1752.07,6257.07 ccw(c1769.14,6274.14) 1769.14,6250 ; 2215,6600.86 ccw(c2190.86,6600.86) 2207.93,6617.93 cw(c2190.86,6600.86) 2215,6600.86 ; 2215,6600.86 cw(c2239.14,6600.86) 2222.07,6617.93 ccw(c2239.14,6600.86) 2215,6600.86
NET0_LED1: JW1.11 RW16.1 | length 714.5
  Top Layer w8: JW1.11@244.09,6592.76 199.76,6592.76 ; RW16.1@327,6349 216,6349 185,6380 185,6578 199.76,6592.76 ; 199.77,6592.76 ccw(c199.77,6622.67) 224.56,6605.94 cw(c199.77,6622.67) 199.77,6592.76 ; 199.77,6592.76 cw(c199.77,6562.85) 224.56,6579.59 ccw(c199.77,6562.85) 199.77,6592.76 ; 214.82,6592.76 ccw(c214.82,6612.52) 231.19,6601.47 cw(c214.82,6612.52) 214.82,6592.76 ; 214.82,6592.76 cw(c214.82,6573.01) 231.19,6584.06 ccw(c214.82,6573.01) 214.82,6592.76 ; 294.41,6349 ccw(c294.41,6381.59) 317.45,6358.55 cw(c294.41,6381.59) 294.41,6349 ; 294.41,6349 cw(c294.41,6316.41) 317.45,6339.45 ccw(c294.41,6316.41) 294.41,6349
NET0_LED2: JW1.10 RW17.1 | length 676
  Top Layer w8: JW1.10@244.09,6914.42 385,7055.33 RW17.1@385,7133 ; 270.65,6940.98 ccw(c297.21,6914.42) 259.65,6914.42 cw(c297.21,6914.42) 270.65,6940.98 ; 270.65,6940.98 cw(c244.09,6967.54) 244.09,6929.98 ccw(c244.09,6967.54) 270.65,6940.98 ; 284.3,6954.64 ccw(c324.52,6914.42) 267.65,6914.42 cw(c324.52,6914.42) 284.3,6954.64 ; 284.3,6954.64 cw(c244.09,6994.85) 244.09,6937.98 ccw(c244.09,6994.85) 284.3,6954.64 ; 385,7100.41 ccw(c352.41,7100.41) 375.45,7123.45 cw(c352.41,7100.41) 385,7100.41 ; 385,7100.41 cw(c417.59,7100.41) 394.55,7123.45 ccw(c417.59,7100.41) 385,7100.41
NET_MISO: U3.35 UW1.34 | length 1653.9
  Top Layer w8: UW1.34@2121.33,6802.06 2222.06,6802.06 v2(2260,6840) ; U3.35@2786.5,7773.27 2861.73,7773.27 v2(2875,7760) ; 2242.93,6822.93 ccw(c2225.86,6840) 2250,6840 cw(c2225.86,6840) 2242.93,6822.93 ; 2242.93,6822.93 cw(c2260,6805.86) 2260,6830 ccw(c2260,6805.86) 2242.93,6822.93
  Bottom Layer w8: v2(2260,6840) 2890,7470 2890,7745 ; v2@2875,7755 v2(2875,7760) 2890,7745 ; 2277.07,6857.07 ccw(c2294.14,6840) 2270,6840 cw(c2294.14,6840) 2277.07,6857.07 ; 2277.07,6857.07 cw(c2260,6874.14) 2260,6850 ccw(c2260,6874.14) 2277.07,6857.07 ; 2890,7745 ccw(c2877.63,7732.63) 2875.96,7750.05 cw(c2877.63,7732.63) 2890,7745 ; 2890,7745 cw(c2902.37,7757.37) 2884.95,7759.04 ccw(c2902.37,7757.37) 2890,7745
NET_MOSI: U3.36 UW1.35 | length 1614.5
  Top Layer w8: UW1.35@2121.33,6821.74 2201.74,6821.74 v2(2220,6840) ; U3.36@2786.5,7753.58 2835,7753.58 2850,7738.58 v2(2850,7730) ; 2202.93,6822.93 ccw(c2185.86,6840) 2210,6840 cw(c2185.86,6840) 2202.93,6822.93 ; 2202.93,6822.93 cw(c2220,6805.86) 2220,6830 ccw(c2220,6805.86) 2202.93,6822.93 ; 2842.45,7746.13 cw(c2828.72,7732.41) 2848.01,7730.22 ccw(c2828.72,7732.41) 2842.45,7746.13
  Bottom Layer w8: v2(2220,6840) 2870,7490 2870,7710 v2(2850,7730) ; 2237.07,6857.07 ccw(c2254.14,6840) 2230,6840 cw(c2254.14,6840) 2237.07,6857.07 ; 2237.07,6857.07 cw(c2220,6874.14) 2220,6850 ccw(c2220,6874.14) 2237.07,6857.07 ; 2867.07,7712.93 ccw(c2850,7695.86) 2850,7720 cw(c2850,7695.86) 2867.07,7712.93 ; 2867.07,7712.93 cw(c2884.14,7730) 2860,7730 ccw(c2884.14,7730) 2867.07,7712.93
NET_NSCLK: U3.34 UW1.33 | length 1972.3
  Top Layer w8: UW1.33@2121.33,6782.37 2242.37,6782.37 v2(2300,6840) ; U3.34@2786.5,7792.95 2862.95,7792.95 v2(2875,7805) ; 2282.93,6822.93 ccw(c2265.86,6840) 2290,6840 cw(c2265.86,6840) 2282.93,6822.93 ; 2282.93,6822.93 cw(c2300,6805.86) 2300,6830 ccw(c2300,6805.86) 2282.93,6822.93 ; U3.34@2821.77,7792.95 ccw(c2821.77,7858.23) 2867.93,7812.07 cw(c2821.77,7858.23) U3.34@2821.77,7792.95 ; 2841.09,7792.95 ccw(c2841.09,7838.91) 2873.59,7806.41 cw(c2841.09,7838.91) 2841.09,7792.95 ; 2860.4,7792.95 ccw(c2860.4,7819.6) 2879.24,7800.76 cw(c2860.4,7819.6) 2860.4,7792.95
  Bottom Layer w8: v2(2300,6840) 2910,7450 2910,7770 v2(2875,7805) ; 2317.07,6857.07 ccw(c2334.14,6840) 2310,6840 cw(c2334.14,6840) 2317.07,6857.07 ; 2317.07,6857.07 cw(c2300,6874.14) 2300,6850 ccw(c2300,6874.14) 2317.07,6857.07 ; 2892.07,7787.93 ccw(c2875,7770.86) 2875,7795 cw(c2875,7770.86) 2892.07,7787.93 ; 2892.07,7787.93 cw(c2909.14,7805) 2885,7805 ccw(c2909.14,7805) 2892.07,7787.93
NET_NSS: U3.33 UW1.32 | length 1938.7
  Top Layer w8: UW1.32@2121.33,6762.68 2262.68,6762.68 v2(2340,6840) ; U3.33@2786.5,7812.64 2817.64,7812.64 v2(2835,7830) ; 2322.93,6822.93 ccw(c2305.86,6840) 2330,6840 cw(c2305.86,6840) 2322.93,6822.93 ; 2322.93,6822.93 cw(c2340,6805.86) 2340,6830 ccw(c2340,6805.86) 2322.93,6822.93 ; U3.33@2817.93,7812.93 ccw(c2800.86,7830) 2825,7830 cw(c2800.86,7830) U3.33@2817.93,7812.93 ; U3.33@2817.93,7812.93 cw(c2835,7795.86) 2835,7820 ccw(c2835,7795.86) U3.33@2817.93,7812.93 ; U3.33@2816.02,7814.54 ccw(c2816.02,7823.04) 2822.03,7817.03 cw(c2816.02,7823.04) U3.33@2816.02,7814.54
  Bottom Layer w8: v2(2340,6840) 2930,7430 2930,7805 2904,7831 2836,7831 v2(2835,7830) ; 2357.07,6857.07 ccw(c2374.14,6840) 2350,6840 cw(c2374.14,6840) 2357.07,6857.07 ; 2357.07,6857.07 cw(c2340,6874.14) 2340,6850 ccw(c2340,6874.14) 2357.07,6857.07 ; v2@2842.07,7822.93 cw(c2861.56,7803.44) 2861.56,7831 ccw(c2861.56,7803.44) v2@2842.07,7822.93 ; v2@2842.07,7837.07 ccw(c2856.73,7851.73) 2856.73,7831 cw(c2856.73,7851.73) v2@2842.07,7837.07
NetC2_2: C2.2 R3.2 R4.1 | length 612.7
  Top Layer w10: C2.2@1780,7620 1790,7630 R4.1@1860,7630 R3.2@1860,7550 ; 1829.82,7630 ccw(c1829.82,7660.18) 1851.16,7638.84 cw(c1829.82,7660.18) 1829.82,7630 ; 1829.82,7630 cw(c1829.82,7599.82) R4.1@1851.16,7621.16 ; 1829.82,7630 cw(c1829.82,7599.82) R4.1@1851.16,7621.16 ; R4.1@1851.16,7621.16 cw(c1829.82,7599.82) 1860,7599.82 ; R4.1@1851.16,7621.16 cw(c1829.82,7599.82) 1860,7599.82 ; 1860,7580.18 ccw(c1890.18,7580.18) 1868.84,7558.84 cw(c1890.18,7580.18) 1860,7580.18 ; 1860,7580.18 cw(c1829.82,7580.18) 1851.16,7558.84 ccw(c1829.82,7580.18) 1860,7580.18 ; 1860,7599.82 cw(c1890.18,7599.82) 1868.84,7621.16 ccw(c1890.18,7599.82) 1860,7599.82 ; C2.2@1781.77,7618.23 cw(c1810.18,7589.82) 1810.18,7630 ccw(c1810.18,7589.82) C2.2@1781.77,7618.23 ; C2.2@1788.84,7611.16 cw(c1834.32,7565.68) 1834.32,7630 ccw(c1834.32,7565.68) C2.2@1788.84,7611.16
NetC10_1: C10.1 FB5.1 Y2.4 | length 840.2
  Top Layer w10: C10.1@3635,7205 FB5.1@3635,7275 Y2.4@3635,7375 ; 3635,7235.18 ccw(c3665.18,7235.18) 3643.84,7213.84 cw(c3665.18,7235.18) 3635,7235.18 ; 3635,7235.18 cw(c3604.82,7235.18) 3626.16,7213.84 ccw(c3604.82,7235.18) 3635,7235.18 ; 3635,7244.82 ccw(c3604.82,7244.82) 3626.16,7266.16 cw(c3604.82,7244.82) 3635,7244.82 ; 3635,7244.82 cw(c3665.18,7244.82) 3643.84,7266.16 ccw(c3665.18,7244.82) 3635,7244.82 ; 3635,7301.53 ccw(c3561.53,7301.53) 3613.48,7353.48 cw(c3561.53,7301.53) 3635,7301.53 ; 3635,7301.53 cw(c3708.47,7301.53) 3656.52,7353.48 ccw(c3708.47,7301.53) 3635,7301.53 ; 3635,7305.18 ccw(c3665.18,7305.18) 3643.84,7283.84 cw(c3665.18,7305.18) 3635,7305.18 ; 3635,7305.18 cw(c3604.82,7305.18) 3626.16,7283.84 ccw(c3604.82,7305.18) 3635,7305.18 ; 3635,7325.67 ccw(c3585.67,7325.67) 3620.55,7360.55 cw(c3585.67,7325.67) 3635,7325.67 ; 3635,7325.67 cw(c3684.33,7325.67) 3649.45,7360.55 ccw(c3684.33,7325.67) 3635,7325.67
NetC12_1: C12.1 R33.2 | length 152
  Top Layer w50: C12.1@1740,5238.7 1790,5288.7 R33.2@1790,5370
NetC17_2: C17.2 Q2.1 R36.2 R41.2 | length 812.6
  Top Layer w10: R36.2@4549.94,6235 R41.2@4629.94,6235 C17.2@4709.94,6235 Q2.1@4789.94,6235 ; 4580.11,6235 ccw(c4580.11,6204.82) 4558.78,6226.16 cw(c4580.11,6204.82) 4580.11,6235 ; 4580.11,6235 cw(c4580.11,6265.18) 4558.78,6243.84 ccw(c4580.11,6265.18) 4580.11,6235 ; 4599.76,6235 ccw(c4599.76,6265.18) 4621.1,6243.84 cw(c4599.76,6265.18) 4599.76,6235 ; 4599.76,6235 cw(c4599.76,6204.82) 4621.1,6226.16 ccw(c4599.76,6204.82) 4599.76,6235 ; 4660.11,6235 ccw(c4660.11,6204.82) 4638.78,6226.16 cw(c4660.11,6204.82) 4660.11,6235 ; 4660.11,6235 cw(c4660.11,6265.18) 4638.78,6243.84 ccw(c4660.11,6265.18) 4660.11,6235 ; 4679.76,6235 ccw(c4679.76,6265.18) 4701.1,6243.84 cw(c4679.76,6265.18) 4679.76,6235 ; 4679.76,6235 cw(c4679.76,6204.82) 4701.1,6226.16 ccw(c4679.76,6204.82) 4679.76,6235 ; 4740.11,6235 ccw(c4740.11,6204.82) 4718.78,6226.16 cw(c4740.11,6204.82) 4740.11,6235 ; 4740.11,6235 cw(c4740.11,6265.18) 4718.78,6243.84 ccw(c4740.11,6265.18) 4740.11,6235 ; 4758.55,6235 ccw(c4758.55,6266.38) 4780.74,6244.19 cw(c4758.55,6266.38) 4758.55,6235 ; 4758.55,6235 cw(c4758.55,6203.62) 4780.74,6225.81 ccw(c4758.55,6203.62) 4758.55,6235
NetC18_1: C18.1 D3.2 R40.1 U8.1 | length 752.3
  Top Layer w20: R40.1@4944.94,6170 C18.1@4944.94,6250 4980,6250 4995,6235 D3.2@5050,6235 5335,6235 5360,6210 U8.1@5360,6140 ; 4944.94,6188.11 ccw(c4963.04,6188.11) 4950.24,6175.3 cw(c4963.04,6188.11) 4944.94,6188.11 ; 4944.94,6188.11 cw(c4926.83,6188.11) 4939.63,6175.3 ccw(c4926.83,6188.11) 4944.94,6188.11 ; 4944.94,6231.89 ccw(c4926.83,6231.89) 4939.63,6244.7 cw(c4926.83,6231.89) 4944.94,6231.89 ; 4944.94,6231.89 cw(c4963.04,6231.89) C18.1@4950.24,6244.7 ; 4944.94,6231.89 cw(c4963.04,6231.89) C18.1@4950.24,6244.7 ; C18.1@4950.24,6244.7 cw(c4963.04,6231.89) 4963.04,6250 ; C18.1@4950.24,6244.7 cw(c4963.04,6231.89) 4963.04,6250 ; 4963.04,6250 cw(c4963.04,6268.11) 4950.24,6255.3 ccw(c4963.04,6268.11) 4963.04,6250
NetC18_2: C18.2 D3.1 Q2.3 U8.2 | length 789.1
  Top Layer w20: Q2.3@4826.94,6315 C18.2@4944.94,6315 4985,6315 5000,6330 D3.1@5050,6330 5335,6330 5360,6355 U8.2@5360,6420 ; 4846.25,6315 ccw(c4846.25,6295.69) 4832.59,6309.34 cw(c4846.25,6295.69) 4846.25,6315 ; 4846.25,6315 cw(c4846.25,6334.31) 4832.59,6320.66 ccw(c4846.25,6334.31) 4846.25,6315 ; 4926.83,6315 ccw(c4926.83,6333.11) 4939.63,6320.3 cw(c4926.83,6333.11) 4926.83,6315 ; 4926.83,6315 cw(c4926.83,6296.89) 4939.63,6309.7 ccw(c4926.83,6296.89) 4926.83,6315 ; 4963.04,6315 ccw(c4963.04,6296.89) 4950.24,6309.7 cw(c4963.04,6296.89) 4963.04,6315 ; 4963.04,6315 cw(c4963.04,6333.11) 4950.24,6320.3 ccw(c4963.04,6333.11) 4963.04,6315
NetC19_1: C19.1 L1.1 U7.2 | length 1210.8
  Top Layer w10: v1(5375,5285) C19.1@5375,5320 ; v1@5375,5289.82 ccw(c5344.82,5289.82) 5366.16,5311.16 cw(c5344.82,5289.82) v1@5375,5289.82 ; v1@5375,5289.82 cw(c5405.18,5289.82) 5383.84,5311.16 ccw(c5405.18,5289.82) v1@5375,5289.82 ; C19.1@5375,5309.14 ccw(c5399.14,5309.14) 5382.07,5292.07 cw(c5399.14,5309.14) C19.1@5375,5309.14 ; C19.1@5375,5309.14 cw(c5350.86,5309.14) 5367.93,5292.07 ccw(c5350.86,5309.14) C19.1@5375,5309.14
  Top Layer w20: U7.2@5665.12,5440 5720,5440 v3(5725,5435) ; 5688.79,5440 cw(c5688.79,5398.79) 5717.93,5427.93 ccw(c5688.79,5398.79) 5688.79,5440
  Top Layer w40: L1.1@5773.11,5160 v3(5830,5160)
  Bottom Layer w10: v1(5375,5285) 5685,5285 ; 5710,5265 ccw(c5688.75,5263.75) 5690,5285 ; 5710,5305 cw(c5687.5,5307.5) 5690,5285 ; 5725,5265 5705,5285 5690,5285 ; 5399.14,5285 ccw(c5399.14,5260.86) 5382.07,5277.93 cw(c5399.14,5260.86) 5399.14,5285 ; 5399.14,5285 cw(c5399.14,5309.14) 5382.07,5292.07 ccw(c5399.14,5309.14) 5399.14,5285 ; 5685,5285 ccw(c5687.5,5307.5) 5690,5285 ; 5685,5285 5687.5,5285 ; 5687.5,5285 cw(c5688.75,5263.75) 5690,5285 ; 5687.5,5285 5690,5285
  Bottom Layer w40: v3(5725,5435) 5725,5265 v3(5830,5160)
NetC19_2: C19.2 U7.6 | length 327.8
  Top Layer w10: C19.2@5440,5320 5485,5320 5500,5335 5500,5390 5512.6,5402.6 U7.6@5554.88,5402.6 ; 5470.18,5320 ccw(c5470.18,5289.82) 5448.84,5311.16 cw(c5470.18,5289.82) 5470.18,5320 ; 5470.18,5320 cw(c5470.18,5350.18) 5448.84,5328.84 ccw(c5470.18,5350.18) 5470.18,5320 ; 5528.6,5402.6 ccw(c5528.6,5419.04) 5540.22,5407.41 cw(c5528.6,5419.04) 5528.6,5402.6 ; 5528.6,5402.6 cw(c5528.6,5386.16) 5540.22,5397.78 ccw(c5528.6,5386.16) 5528.6,5402.6
NetC22_2: C22.2 F2.1 L1.2 R43.1 | length 842.1
  Top Layer w10: F2.1@5292.99,5160 5292.99,5462.99 5310,5480 R43.1@5375,5480 ; 5292.99,5212.18 ccw(c5328.44,5212.18) 5303.38,5187.12 cw(c5328.44,5212.18) 5292.99,5212.18 ; 5292.99,5212.18 cw(c5257.54,5212.18) 5282.61,5187.12 ccw(c5257.54,5212.18) 5292.99,5212.18 ; 5344.82,5480 ccw(c5344.82,5510.18) 5366.16,5488.84 cw(c5344.82,5510.18) 5344.82,5480 ; 5344.82,5480 cw(c5344.82,5449.82) 5366.16,5471.16 ccw(c5344.82,5449.82) 5344.82,5480
  Top Layer w40: F2.1@5292.99,5160 C22.2@5400,5160 L1.2@5536.89,5160
NetCW1_1: CW1.1 UW1.20 | length 551.4
  Top Layer w8: CW1.1@1874,6375 v2(1874,6414) ; v2(1960,6505) 1973.69,6518.69 UW1.20@1973.69,6555.99 ; CW1.1@1874,6389.86 ccw(c1849.86,6389.86) 1866.93,6406.93 cw(c1849.86,6389.86) CW1.1@1874,6389.86 ; CW1.1@1874,6389.86 cw(c1898.14,6389.86) 1881.07,6406.93 ccw(c1898.14,6389.86) CW1.1@1874,6389.86 ; v2(1874,6414) ccw(c1899.71,6414) 1885.56,6392.53 cw(c1899.71,6414) v2(1874,6414) ; v2(1874,6414) cw(c1848.29,6414) 1862.44,6392.53 ccw(c1848.29,6414) v2(1874,6414)
  Bottom Layer w8: v2(1874,6414) 1874,6419 v2(1960,6505) ; 1942.93,6487.93 ccw(c1925.86,6505) 1950,6505 cw(c1925.86,6505) 1942.93,6487.93 ; 1942.93,6487.93 cw(c1960,6470.86) 1960,6495 ccw(c1960,6470.86) 1942.93,6487.93 ; v2@1874,6424 ccw(c1874,6436.07) 1882.54,6427.54 cw(c1874,6436.07) v2@1874,6424 ; v2@1884,6414 cw(c1920.21,6414) 1894.61,6439.61 ccw(c1920.21,6414) v2@1884,6414
NetCW2_1: CW2.1 UW1.22 | length 323.3
  Top Layer w8: CW2.1@1965,6355 1965,6400 2013.06,6448.06 UW1.22@2013.06,6555.99 ; 1965,6387.59 ccw(c1997.59,6387.59) 1974.55,6364.55 cw(c1997.59,6387.59) 1965,6387.59 ; 1965,6387.59 cw(c1932.41,6387.59) 1955.45,6364.55 ccw(c1932.41,6387.59) 1965,6387.59
NetCW3_2: CW3.2 RW10.2 UW1.30 Y1.1 | length 1356.5
  Top Layer w8: UW1.30@2121.33,6723.32 2296.68,6723.32 2319,6701 RW10.2@2357,6701 2357,6643 2390,6610 2480,6610 2502,6632 ; CW3.2@2603,6680 Y1.1@2502,6680 2502,6632 ; 2324.41,6701 ccw(c2324.41,6733.59) 2347.45,6710.55 cw(c2324.41,6733.59) 2324.41,6701 ; 2324.41,6701 cw(c2324.41,6668.41) RW10.2@2347.45,6691.45 ; 2324.41,6701 cw(c2324.41,6668.41) RW10.2@2347.45,6691.45 ; RW10.2@2347.45,6691.45 cw(c2324.41,6668.41) 2357,6668.41 ; RW10.2@2347.45,6691.45 cw(c2324.41,6668.41) 2357,6668.41 ; 2357,6668.41 cw(c2389.59,6668.41) 2366.55,6691.45 ccw(c2389.59,6668.41) 2357,6668.41 ; 2502,6632 ccw(c2461.54,6632) 2489.24,6661.49 cw(c2461.54,6632) 2502,6632 ; 2502,6632 cw(c2542.46,6632) 2514.76,6661.49 ccw(c2542.46,6632) 2502,6632 ; 2502,6650.49 ccw(c2478.91,6650.49) 2494.72,6667.33 cw(c2478.91,6650.49) 2502,6650.49 ; 2502,6650.49 cw(c2525.09,6650.49) 2509.28,6667.33 ccw(c2525.09,6650.49) 2502,6650.49 ; 2527.68,6680 ccw(c2527.68,6654.32) 2509.52,6672.48 cw(c2527.68,6654.32) 2527.68,6680 ; 2527.68,6680 cw(c2527.68,6705.68) 2509.52,6687.52 ccw(c2527.68,6705.68) 2527.68,6680 ; 2547,6680 ccw(c2547,6635) 2515.18,6666.82 cw(c2547,6635) 2547,6680 ; 2547,6680 cw(c2547,6725) 2515.18,6693.18 ccw(c2547,6725) 2547,6680 ; 2570.41,6680 ccw(c2570.41,6712.59) 2593.45,6689.55 cw(c2570.41,6712.59) 2570.41,6680 ; 2570.41,6680 cw(c2570.41,6647.41) 2593.45,6670.45 ccw(c2570.41,6647.41) 2570.41,6680
NetCW4_2: CW4.2 RW10.1 UW1.31 Y1.3 | length 1166.1
  Top Layer w8: UW1.31@2121.33,6743 2298,6743 2321,6766 RW10.1@2357,6766 2438.39,6766 Y1.3@2439.01,6766.61 CW4.2@2439,6854 ; 2324.41,6766 ccw(c2324.41,6798.59) 2347.45,6775.55 cw(c2324.41,6798.59) 2324.41,6766 ; 2324.41,6766 cw(c2324.41,6733.41) 2347.45,6756.45 ccw(c2324.41,6733.41) 2324.41,6766 ; 2389.59,6766 ccw(c2389.59,6733.41) 2366.55,6756.45 cw(c2389.59,6733.41) 2389.59,6766 ; 2389.59,6766 cw(c2389.59,6798.59) 2366.55,6775.55 ccw(c2389.59,6798.59) 2389.59,6766 ; 2439.01,6797.22 ccw(c2464.69,6797.22) 2446.53,6779.06 cw(c2464.69,6797.22) 2439.01,6797.22 ; 2439.01,6797.22 cw(c2413.33,6797.22) 2431.49,6779.06 ccw(c2413.33,6797.22) 2439.01,6797.22 ; 2439.01,6816.53 ccw(c2484,6816.53) 2452.19,6784.71 cw(c2484,6816.53) 2439.01,6816.53 ; 2439.01,6816.53 cw(c2394.01,6816.53) 2425.83,6784.71 ccw(c2394.01,6816.53) 2439.01,6816.53 ; 2392.53,6766 ccw(c2392.53,6813.09) 2425.83,6779.79 cw(c2392.53,6813.09) 2392.53,6766 ; 2395.5,6766 cw(c2395.5,6723.1) 2425.83,6753.44 ccw(c2395.5,6723.1) 2395.5,6766 ; 2411.84,6766 ccw(c2411.84,6793.78) 2431.49,6774.14 cw(c2411.84,6793.78) 2411.84,6766 ; 2414.81,6766 cw(c2414.81,6742.42) 2431.49,6759.09 ccw(c2414.81,6742.42) 2414.81,6766 ; CW4.2@2429.45,6844.45 cw(c2406.39,6821.39) 2439.01,6821.39 ccw(c2406.39,6821.39) CW4.2@2429.45,6844.45 ; 2439.01,6821.43 cw(c2471.57,6821.43) 2448.55,6844.45 ccw(c2471.57,6821.43) 2439.01,6821.43
NetCW5_1: CW5.1 RW15.1 RW19.1 | length 675.1
  Top Layer w20: v2(1360,6665) 1394,6631 CW5.1@1441,6631 RW15.1@1441,6712 ; v2(1360,6830) 1415,6830 1441,6804 RW19.1@1441,6795 ; 1422.89,6631 ccw(c1422.89,6649.11) CW5.1@1435.7,6636.3 ; 1422.89,6631 cw(c1422.89,6612.89) 1435.7,6625.7 ccw(c1422.89,6612.89) 1422.89,6631 ; 1422.89,6631 ccw(c1422.89,6649.11) CW5.1@1435.7,6636.3 ; CW5.1@1435.7,6636.3 ccw(c1422.89,6649.11) 1441,6649.11 ; CW5.1@1435.7,6636.3 ccw(c1422.89,6649.11) 1441,6649.11 ; 1441,6649.11 ccw(c1459.11,6649.11) 1446.3,6636.3 cw(c1459.11,6649.11) 1441,6649.11 ; 1441,6693.89 ccw(c1422.89,6693.89) 1435.7,6706.7 cw(c1422.89,6693.89) 1441,6693.89 ; 1441,6693.89 cw(c1459.11,6693.89) 1446.3,6706.7 ccw(c1459.11,6693.89) 1441,6693.89 ; 1421.83,6823.17 cw(c1393.67,6795) 1433.5,6795 ccw(c1393.67,6795) 1421.83,6823.17
  Bottom Layer w20: v2(1360,6665) v2(1360,6830)
NetCW6_1: CW6.1 JW1.3 | length 704.7
  Top Layer w8: JW1.3@687,6828.79 879.21,6828.79 917,6791 CW6.1@977,6791 ; 724.56,6828.79 ccw(c724.56,6791.22) 698,6817.79 cw(c724.56,6791.22) 724.56,6828.79 ; 724.56,6828.79 cw(c724.56,6866.35) 698,6839.79 ccw(c724.56,6866.35) 724.56,6828.79 ; 743.88,6828.79 ccw(c743.88,6771.91) 703.66,6812.13 cw(c743.88,6771.91) 743.88,6828.79 ; 743.88,6828.79 cw(c743.88,6885.66) 703.66,6845.45 ccw(c743.88,6885.66) 743.88,6828.79 ; 944.41,6791 ccw(c944.41,6823.59) 967.45,6800.55 cw(c944.41,6823.59) 944.41,6791 ; 944.41,6791 cw(c944.41,6758.41) 967.45,6781.45 ccw(c944.41,6758.41) 944.41,6791
NetCW7_1: CW7.1 JW1.6 | length 605.2
  Top Layer w8: JW1.6@787,6678 862,6678 901,6717 CW7.1@977,6717 ; 824.56,6678 ccw(c824.56,6640.44) 798,6667 cw(c824.56,6640.44) 824.56,6678 ; 824.56,6678 cw(c824.56,6715.56) 798,6689 ccw(c824.56,6715.56) 824.56,6678 ; 843.88,6678 ccw(c843.88,6621.12) 803.66,6661.34 cw(c843.88,6621.12) 843.88,6678 ; 843.88,6678 cw(c843.88,6734.88) 803.66,6694.66 ccw(c843.88,6734.88) 843.88,6678 ; 944.41,6717 ccw(c944.41,6749.59) 967.45,6726.55 cw(c944.41,6749.59) 944.41,6717 ; 944.41,6717 cw(c944.41,6684.41) 967.45,6707.45 ccw(c944.41,6684.41) 944.41,6717
NetCW8_1: CW8.1 JW1.5 RW22.2 | length 1303.4
  Top Layer w8: v2(908,6471) CW8.1@978,6471 RW22.2@978,6395 ; 932.14,6471 ccw(c932.14,6446.86) 915.07,6463.93 cw(c932.14,6446.86) 932.14,6471 ; 932.14,6471 cw(c932.14,6495.14) 915.07,6478.07 ccw(c932.14,6495.14) 932.14,6471 ; 945.41,6471 ccw(c945.41,6503.59) 968.45,6480.55 cw(c945.41,6503.59) 945.41,6471 ; 945.41,6471 cw(c945.41,6438.41) CW8.1@968.45,6461.45 ; 945.41,6471 cw(c945.41,6438.41) CW8.1@968.45,6461.45 ; CW8.1@968.45,6461.45 cw(c945.41,6438.41) 978,6438.41 ; CW8.1@968.45,6461.45 cw(c945.41,6438.41) 978,6438.41 ; 978,6427.59 ccw(c1010.59,6427.59) 987.55,6404.55 cw(c1010.59,6427.59) 978,6427.59 ; 978,6427.59 cw(c945.41,6427.59) 968.45,6404.55 ccw(c945.41,6427.59) 978,6427.59 ; 978,6438.41 cw(c1010.59,6438.41) 987.55,6461.45 ccw(c1010.59,6438.41) 978,6438.41
  Bottom Layer w8: JW1.5@687,6728 736,6679 736,6552 817,6471 v2(908,6471) ; 713.56,6701.44 ccw(c687,6674.88) 687,6712.44 cw(c687,6674.88) 713.56,6701.44 ; 713.56,6701.44 cw(c740.12,6728) 702.56,6728 ccw(c740.12,6728) 713.56,6701.44 ; 727.22,6687.78 ccw(c687,6647.56) 687,6704.44 cw(c687,6647.56) 727.22,6687.78 ; 727.22,6687.78 cw(c767.44,6728) 710.56,6728 ccw(c767.44,6728) 727.22,6687.78 ; 883.86,6471 ccw(c883.86,6495.14) 900.93,6478.07 cw(c883.86,6495.14) 883.86,6471 ; 883.86,6471 cw(c883.86,6446.86) 900.93,6463.93 ccw(c883.86,6446.86) 883.86,6471
NetCW9_1: CW9.1 JW1.4 RW20.2 | length 1140.1
  Top Layer w8: v2(913,6634) RW20.2@978,6634 CW9.1@978,6552 ; 937.14,6634 ccw(c937.14,6609.86) 920.07,6626.93 cw(c937.14,6609.86) 937.14,6634 ; 937.14,6634 cw(c937.14,6658.14) 920.07,6641.07 ccw(c937.14,6658.14) 937.14,6634 ; 945.41,6634 ccw(c945.41,6666.59) 968.45,6643.55 cw(c945.41,6666.59) 945.41,6634 ; 945.41,6634 cw(c945.41,6601.41) RW20.2@968.45,6624.45 ; 945.41,6634 cw(c945.41,6601.41) RW20.2@968.45,6624.45 ; RW20.2@968.45,6624.45 cw(c945.41,6601.41) 978,6601.41 ; RW20.2@968.45,6624.45 cw(c945.41,6601.41) 978,6601.41 ; 978,6584.59 ccw(c1010.59,6584.59) 987.55,6561.55 cw(c1010.59,6584.59) 978,6584.59 ; 978,6584.59 cw(c945.41,6584.59) 968.45,6561.55 ccw(c945.41,6584.59) 978,6584.59 ; 978,6601.41 cw(c1010.59,6601.41) 987.55,6624.45 ccw(c1010.59,6601.41) 978,6601.41
  Bottom Layer w8: JW1.4@787,6778.79 856.21,6778.79 913,6722 v2(913,6634) ; 824.56,6778.79 ccw(c824.56,6741.22) 798,6767.79 cw(c824.56,6741.22) 824.56,6778.79 ; 824.56,6778.79 cw(c824.56,6816.35) 798,6789.79 ccw(c824.56,6816.35) 824.56,6778.79 ; 843.88,6778.79 ccw(c843.88,6721.91) 803.66,6762.13 cw(c843.88,6721.91) 843.88,6778.79 ; 843.88,6778.79 cw(c843.88,6835.66) 803.66,6795.45 ccw(c843.88,6835.66) 843.88,6778.79 ; 913,6658.14 ccw(c937.14,6658.14) 920.07,6641.07 cw(c937.14,6658.14) 913,6658.14 ; 913,6658.14 cw(c888.86,6658.14) 905.93,6641.07 ccw(c888.86,6658.14) 913,6658.14
NetD6_1: D6.1 R45.1 | length 130.4
  Top Layer w50: R45.1@2665,4670 2665.91,4669.09 D6.1@2665.91,4540
NetF1_2: F1.2 RT1.1 RV2.2 | length 782.4
  Top Layer w100: F1.2@4865,1410 5110,1410 5215,1515 RV2.2@5215,1691.26 5293.74,1770 RT1.1@5395,1770
NetJ9_5: J9.5 J9.6 | length 508.1
  Top Layer w100: J9.5@424,5225 560,5225 600,5265 600,5390 565,5425 J9.6@424,5425
NetJW1_9: JW1.9 RW23.2 | length 517.7
  Top Layer w8: RW23.2@244,7133 244.09,7132.91 JW1.9@244.09,7014.42 ; 244.09,7051.98 ccw(c281.65,7051.98) 255.09,7025.42 cw(c281.65,7051.98) 244.09,7051.98 ; 244.09,7051.98 cw(c206.52,7051.98) 233.08,7025.42 ccw(c206.52,7051.98) 244.09,7051.98 ; 244.09,7071.29 ccw(c300.96,7071.29) 260.75,7031.08 cw(c300.96,7071.29) 244.09,7071.29 ; 244.09,7071.29 cw(c187.21,7071.29) 227.43,7031.08 ccw(c187.21,7071.29) 244.09,7071.29 ; RW23.2@234.45,7123.45 cw(c211.2,7100.2) 244.09,7100.2 ccw(c211.2,7100.2) RW23.2@234.45,7123.45 ; 244.09,7100.62 cw(c276.38,7100.62) 253.55,7123.45 ccw(c276.38,7100.62) 244.09,7100.62
NetJW1_12: JW1.12 RW21.2 | length 742.5
  Top Layer w8: JW1.12@244.09,6492.76 300.85,6436 464,6436 493,6407 RW21.2@493,6348 ; 270.65,6466.2 ccw(c244.09,6439.64) 244.09,6477.2 cw(c244.09,6439.64) 270.65,6466.2 ; 270.65,6466.2 cw(c297.21,6492.76) 259.65,6492.76 ccw(c297.21,6492.76) 270.65,6466.2 ; 284.3,6452.55 ccw(c244.09,6412.33) 244.09,6469.2 cw(c244.09,6412.33) 284.3,6452.55 ; 284.3,6452.55 cw(c324.52,6492.76) 267.65,6492.76 ccw(c324.52,6492.76) 284.3,6452.55 ; 493,6380.59 ccw(c525.59,6380.59) 502.55,6357.55 cw(c525.59,6380.59) 493,6380.59 ; 493,6380.59 cw(c460.41,6380.59) 483.45,6357.55 ccw(c460.41,6380.59) 493,6380.59